# Altium PCB FuseBoardPCB.PcbDoc
Units mil, origin at the board's own origin, x right, y up, seen from the top; angles counter-clockwise.
Board outline 1900 x 910 mil, 2 copper layers (Top Layer, Bottom Layer); 8 components, 6 nets, 25 pads, 2 vias.
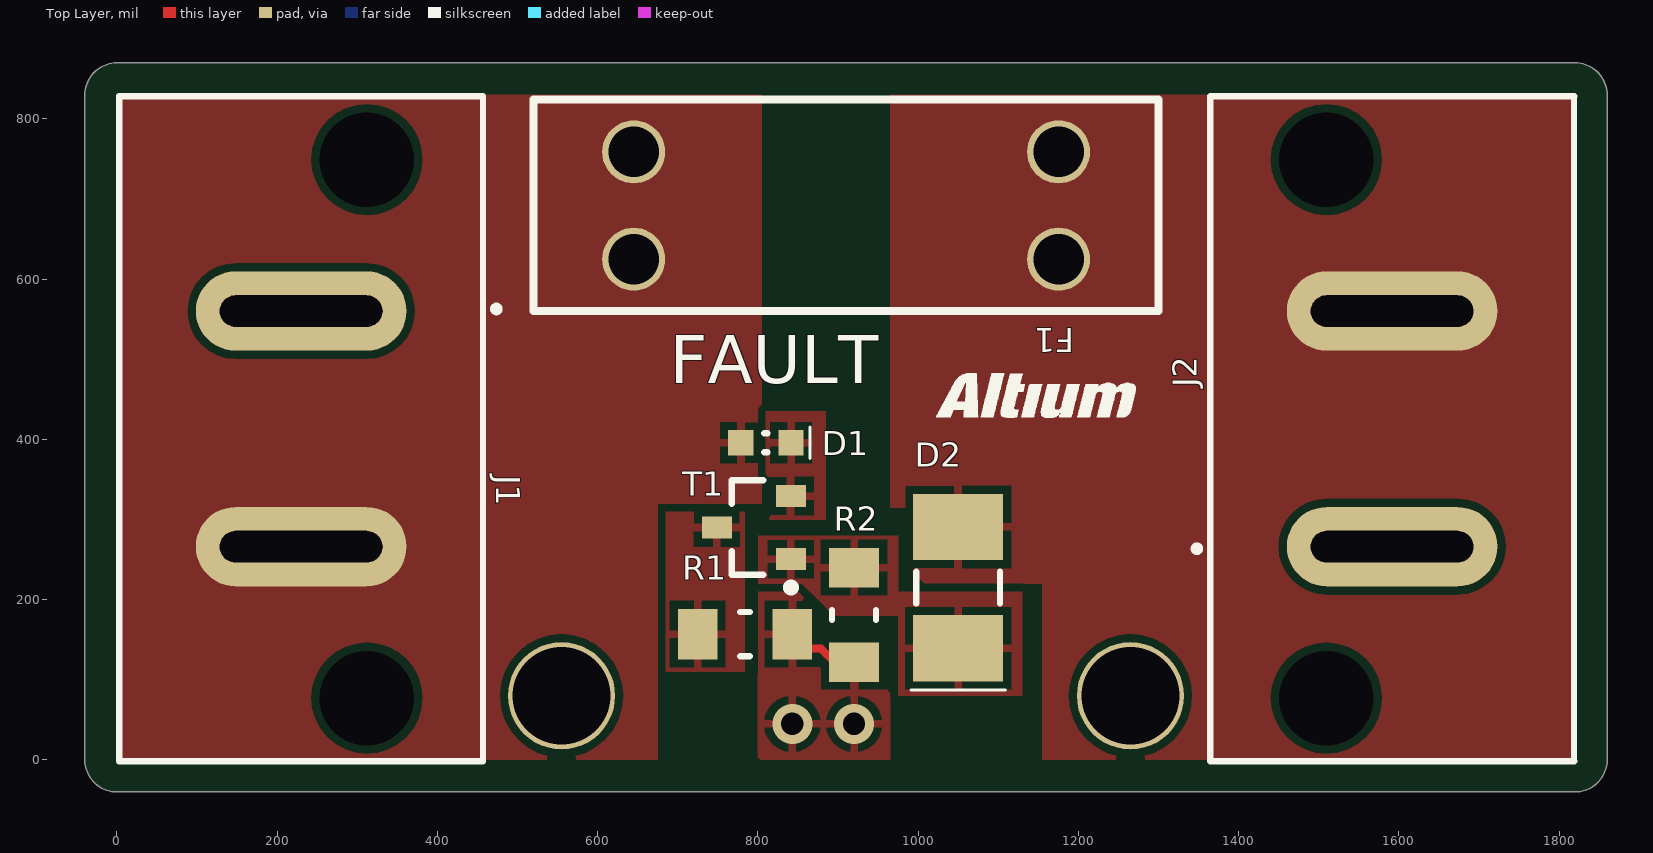
[diagram p0: Top Layer view]
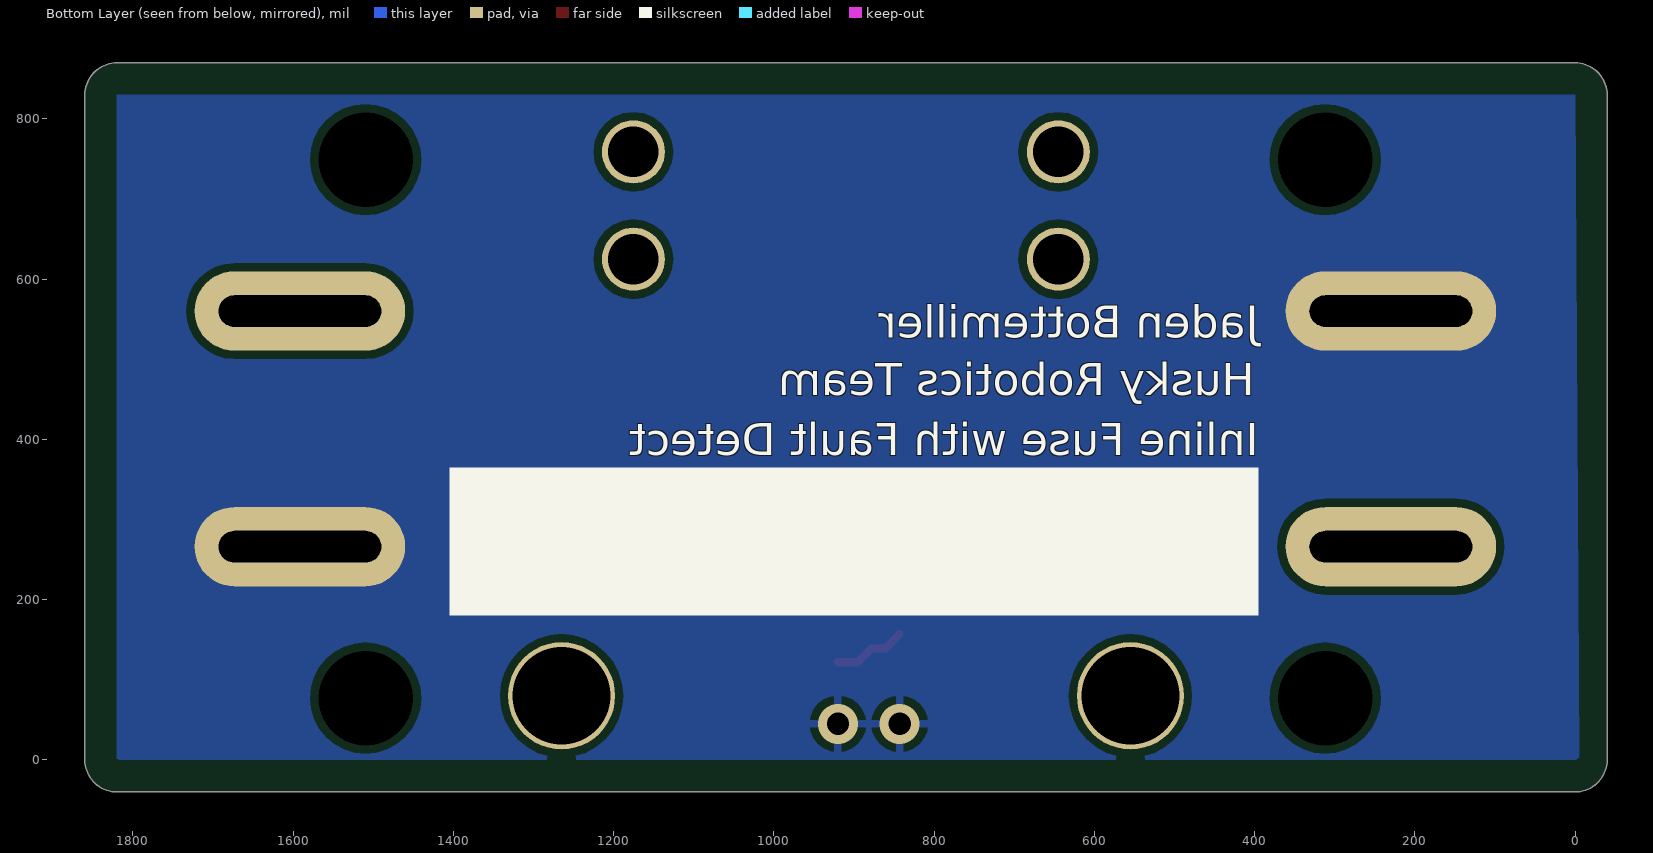
[diagram p1: Bottom Layer view, seen from below]

## Layer stack, top to bottom
Top Solder: solder mask 0.4, Solder Resist, Dk 3.5
Top Layer: signal copper 1.4
Dielectric 1: dielectric 12.6, FR-4, Dk 4.8
Bottom Layer: signal copper 1.4
Bottom Solder: solder mask 0.4, Solder Resist, Dk 3.5

## Board outline
-40,0 -40,830 cw(c0,830) 0,870 1820,870 cw(c1820,830) 1860,830 1860,0 cw(c1820,0) 1820,-40 0,-40 cw(c0,0)

## Design rules (kind name [scope] priority, off if disabled: settings)
Clearance [All] p1: gap=10 ignorepadtopadclearanceinfootprint=FALSE except(0: Arc-Hole Track-Hole SMDPad-Hole THPad-Hole Via-Hole Fill-Hole Poly-Hole Region-Hole Text-Hole)
PolygonConnect PolygonConnect_2 [HasFootprint('1720420202')] p1: connectstyle=Direct reliefconductorwidth=10 reliefentries=4 polygonreliefangle="90 Angle" airgapwidth=10
PolygonConnect PolygonConnect_1 [HasFootprint('FUSE HOLDER')] p2: connectstyle=Direct reliefconductorwidth=10 reliefentries=4 polygonreliefangle="90 Angle" airgapwidth=10
PolygonConnect [All] p3: connectstyle=Relief reliefconductorwidth=10 reliefentries=4 polygonreliefangle="90 Angle" airgapwidth=10
RoutingVias [All] p1: holewidth=28 width=50 viastyle="Through Hole" minholewidth=28 minwidth=50 maxholewidth=28 maxwidth=50
SolderMaskExpansion [All] p1: expansion=4
Width [All] p1: maxlimit=10 minlimit=10 preferedwidth=10
30 further rules are at their usual default settings.

## Components (designator, comment, footprint, x,y, rotation, side; value= is the part's Value field where it differs from the comment)
D1 "LED" DIOC1608X08L 810,395.79 r180 top
D2 "DIODE" DIOC5226X24L 1050,215 r90 top
F1 "FUSE" "FUSE HOLDER" 645,625 r0 top
J1 "MOLEX_SABRE" 1720420202 457,-1.78 r90 top
J2 "MOLEX_SABRE" 1720420202 1364.66,828.22 r270 top
R1 "RES" RESC3115X06L 696.29,121.47 r0 top
R2 "RES" RESC3115X06L 884.51,268.6 r270 top
T1 "PNP" SOT100P240X110-3N 795,290 r180 top

## Footprints (in the part's own frame and the unit in brackets; to place one, negate y for a bottom-side part, rotate by r counter-clockwise, add the part's x,y. Pads: shape width x height; smd on the part's side, far side on the other; paste and mask are expansions set on the pad)
1720420202 [mil] "Molex Super Sabre connector, board mount"
  oval 99x263 hole 39 slot 203 at 90 deg: 1(562,227) 2(268,227)
  round 0 hole 118 unplated mask+0: ""(79,145) ""(751,145)
  Top Layer pour cut-out: 121,393
  Top Layer pour cut-out: 165,376
  Top Layer pour cut-out: 159,69
  Top Layer pour cut-out: 145,373
  silkscreen extent 0,-21 830,455
DIOC1608X08L [mm] "Chip Diode, 2-Leads, Body 1.60x0.80mm, IPC High Density"
  rect 0.8x0.8 smd: 1(-0.8,0) 2(0.8,0)
  silkscreen extent -1.4,-0.5 0.05,0.5, body extent -0.85,-0.45 0.85,0.45, height 0.8
DIOC5226X24L [mm] "Chip Diode, 2-Leads, Body 5.20x2.61mm, IPC High Density"
  rect 2.1x2.85 smd: 1(-1.925,0) 2(1.925,0)
  silkscreen extent -3.25,-1.5 0.5,1.5, body extent -2.8,-1.46 2.8,1.46, height 2.4
"FUSE HOLDER" [mm]
  round 2 hole 1.6: 1(0,0) 1(0,3.4) 2(13.47,0) 2(13.47,3.4)
  silkscreen extent -3.17,-1.65 16.64,5.06
RESC3115X06L [mm] "Chip Resistor, 2-Leads, Body 3.10x1.50mm, IPC High Density"
  rect 1.25x1.6 smd: 1(0.726,0.901) 2(3.726,0.901)
  silkscreen extent 2.08,0.2 2.38,1.6, body extent 0.58,0.05 3.88,1.75, height 0.6
SOT100P240X110-3N [mm] "SOT23, 3-Leads, Body 2.90x2.40mm, Pitch 1.00mm, IPC Medium Density"
  rect 0.95x0.7 smd: 1(-1.175,1) 2(-1.175,-1) 3(1.175,0)
  silkscreen extent -1.3,-1.5 0.7,2.02, body extent -0.7,-1.5 0.7,1.5, height 1.1

## Free pads (board coordinates)
  round 133.86 hole 122.05: ""(555,80) ""(1265,80)

## Via types
v1: diameter 50, hole 28, Top Layer to Bottom Layer, 2 vias

## Nets (pads, with @x,y where several pads share a name; then routed paths per layer and width w, separated by ;. In a path a pad name is that pad's centre, name@x,y a point inside that pad or via, vN(x,y) a via of type N, cw(c..) or ccw(c..) an arc to the next point about the centre after c; other vN are vias at no path point)
NetD1_A: D1.2 F1.1 J1.2
NetD1_C: D1.1 T1.2
NetD2_A: D2.2 F1.2 J2.2
NetD2_C: D2.1 R2.1 T1.1
NetJ1_1: J1.1 J2.1 R1.2 R2.2 | length 91.5
  Top Layer w10: R1.2 860.74,139.21 878.5,139.21 895.83,121.89 R2.2
  other v1: 843,45 920,45
NetR1_1: R1.1 T1.3
pads on no net: J1. J2.

## Polygon pours and split planes (outlines as drawn)
NetJ1_1 on Top Layer "Top Layer-NetJ1_1" (solid, pour order 10): 800.37,210 849.25,210 850,209.25 855.75,209.25 895,170 965,170 965,0 799.77,0
NetD2_A on Top Layer "Top Layer-NetD2_A" (solid, pour order 16): 965,830 965,315 985,315 985,243.12 1008.12,220 1155,220 1155,0 1820,0 1820,830
NetD1_A on Top Layer "Top Layer-NetD1_A 1" (solid, pour order 12): 0,0 500,0 500,495 760,495 760,830 0,830
NetD1_A on Top Layer "Top Layer-NetD1_A" (solid, pour order 2): 805,830 805,320 675,320 675,0 465,0 465,830
NetR1_1 on Top Layer "Top Layer-NetR1_1" (solid, pour order 8): 680.53,315 790,315 783.5,308.5 783.5,110 680.36,110
NetD2_C on Top Layer "Top Layer-NetD2_C" (solid, pour order 6): 765,215
NetD2_C on Top Layer "Top Layer-NetD2_C 1" (solid, pour order 4): 800.37,280 975,280 975,210 1130,210 1130,80 975,80 975,180 895,180 855,220 800.37,220
NetD1_C on Top Layer "Top Layer-NetD1_C" (solid, pour order 0): 810,435 810,299.44 885,299.44 885,435
NetJ1_1 on Bottom Layer "Bottom Layer-NetJ1_1" (solid, pour order 14): 0,830 1820,830 1820,-5 1815,0 -5,0

## Silkscreen, mask and mechanical layers (free items; w line width, h text height)
Top Overlay:
  drawing of 6 lines, arcs and shapes, not listed
  text "FAULT" at 690,470 h60
Bottom Overlay:
  rectangle: 395,180 1405,365
  text "Jaden Bottemiller" at 395,527 h40
  text "Husky Robotics Team" at 400,455 h40
  text "Inline Fuse with Fault Detect" at 395,380 h40
Mechanical 1:
  the board outline again, w10